# Altium PCB usb-cuter.PcbDoc
Units mm, origin at the board's own origin, x right, y up, seen from the top; angles counter-clockwise.
Board outline 151 x 86.38 mm, 2 copper layers (Top Layer, Bottom Layer); 15 components, 15 nets, 44 pads, 0 vias.
Unrouted connection lines stored in the file: 1.
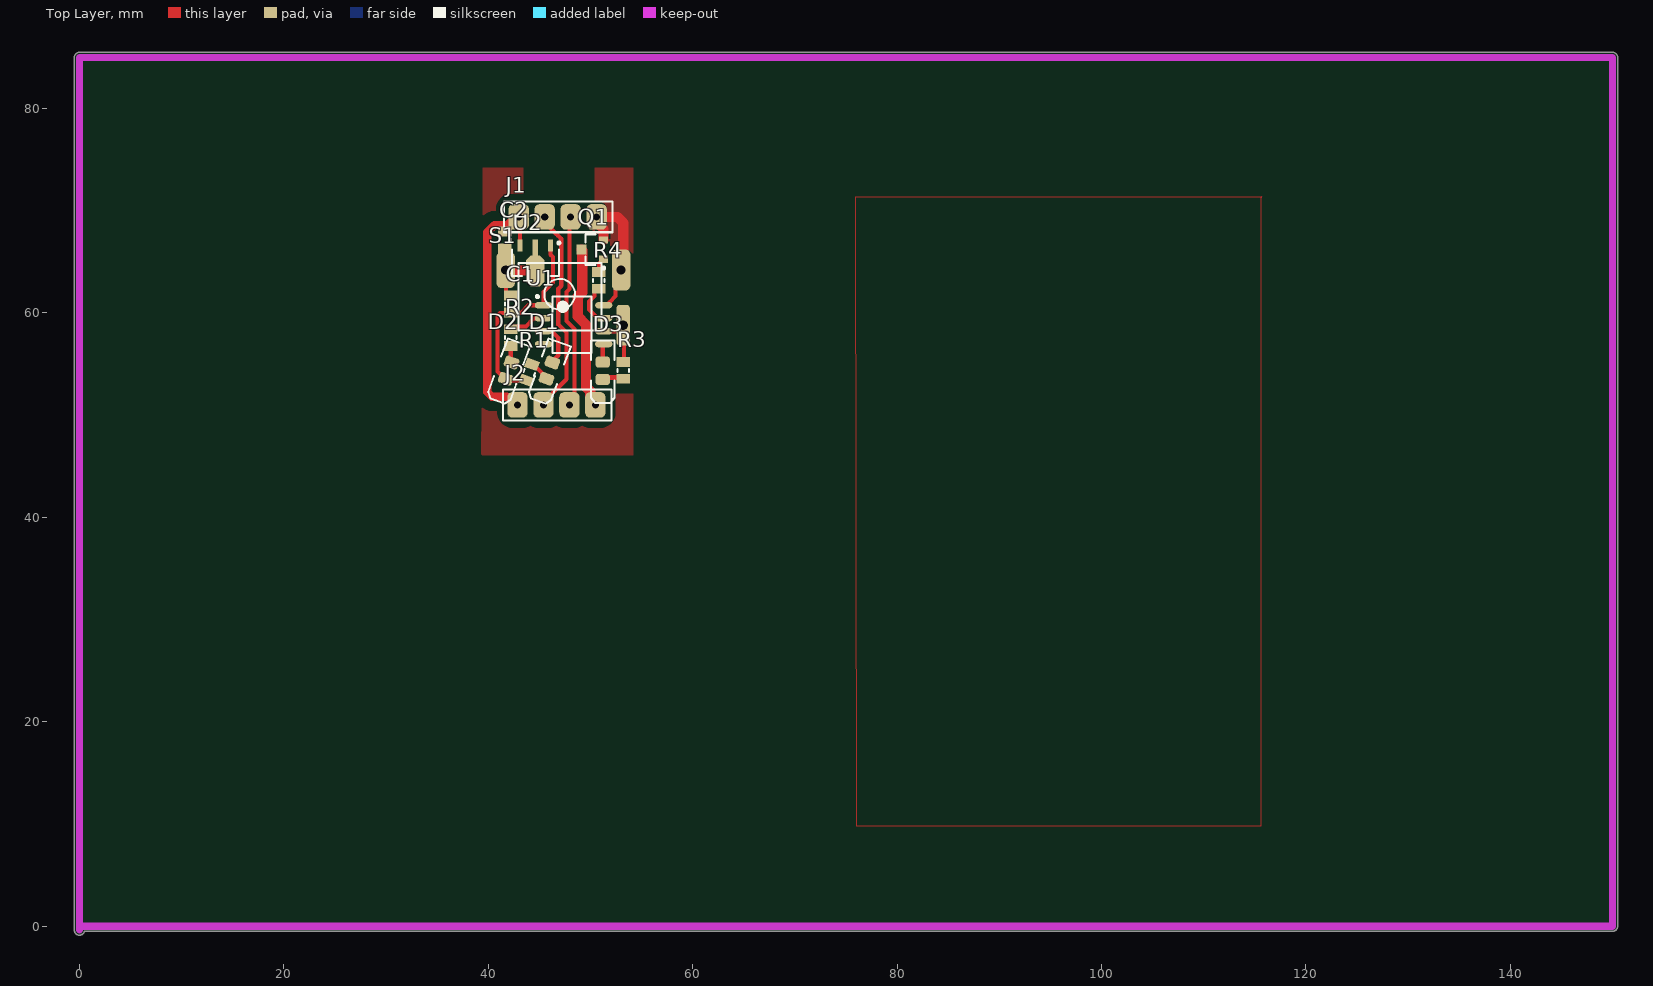
[diagram p0: Top Layer view]
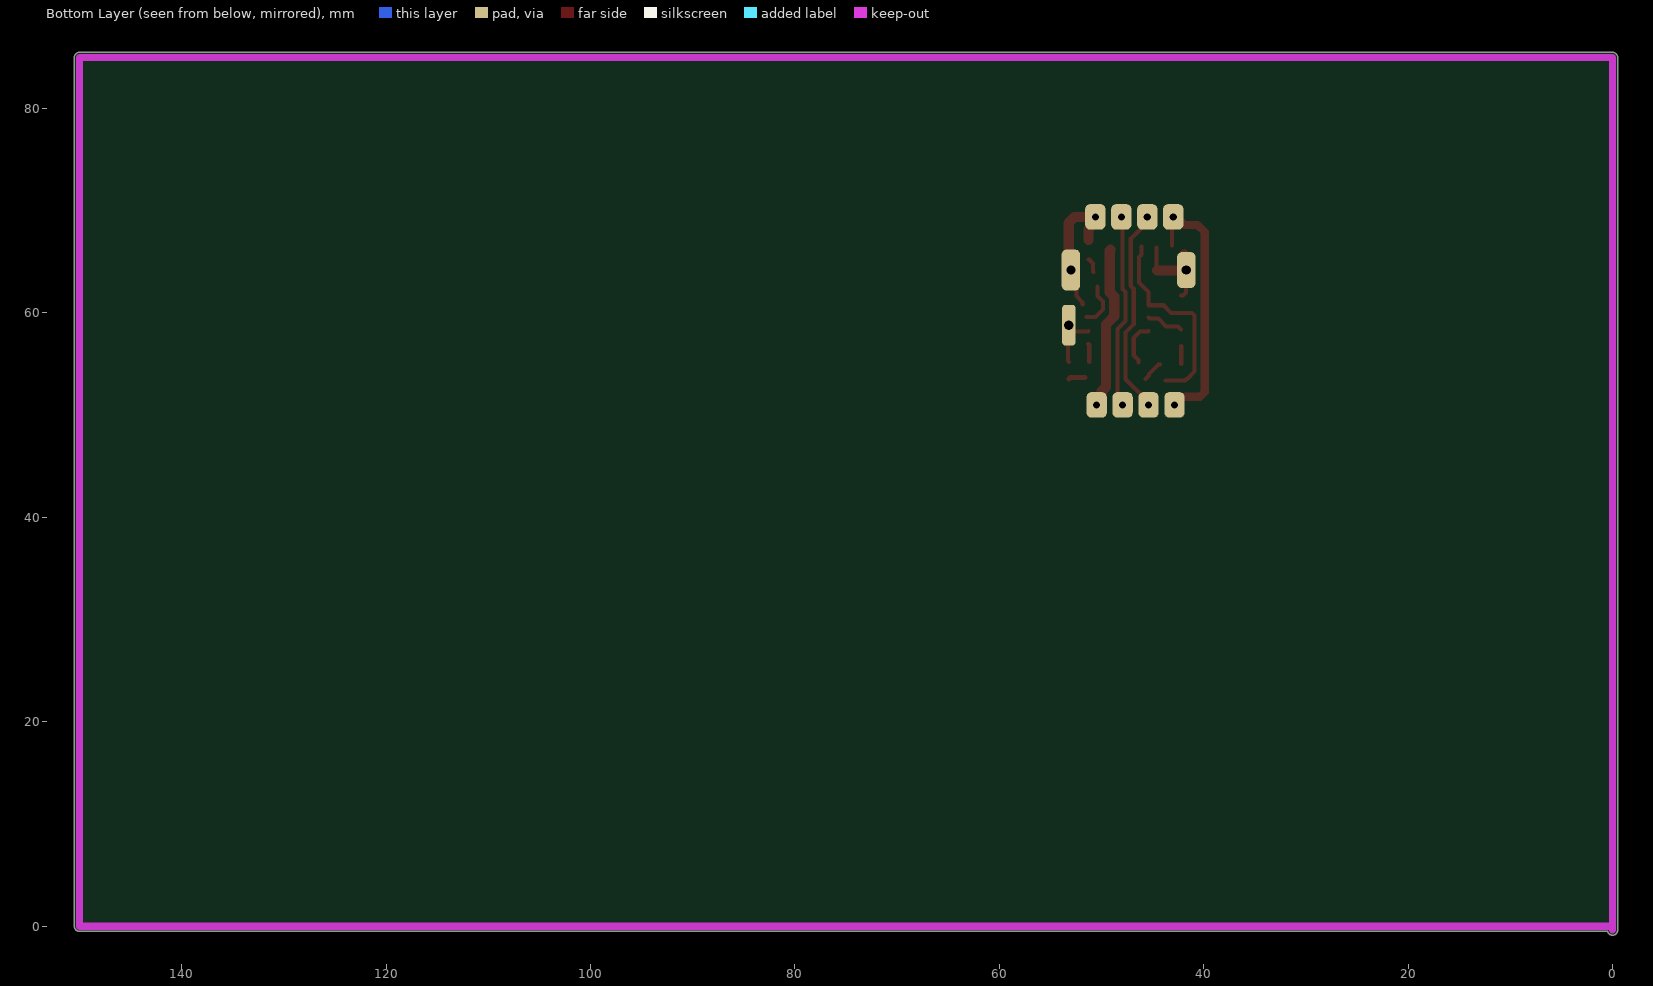
[diagram p1: Bottom Layer view, seen from below]
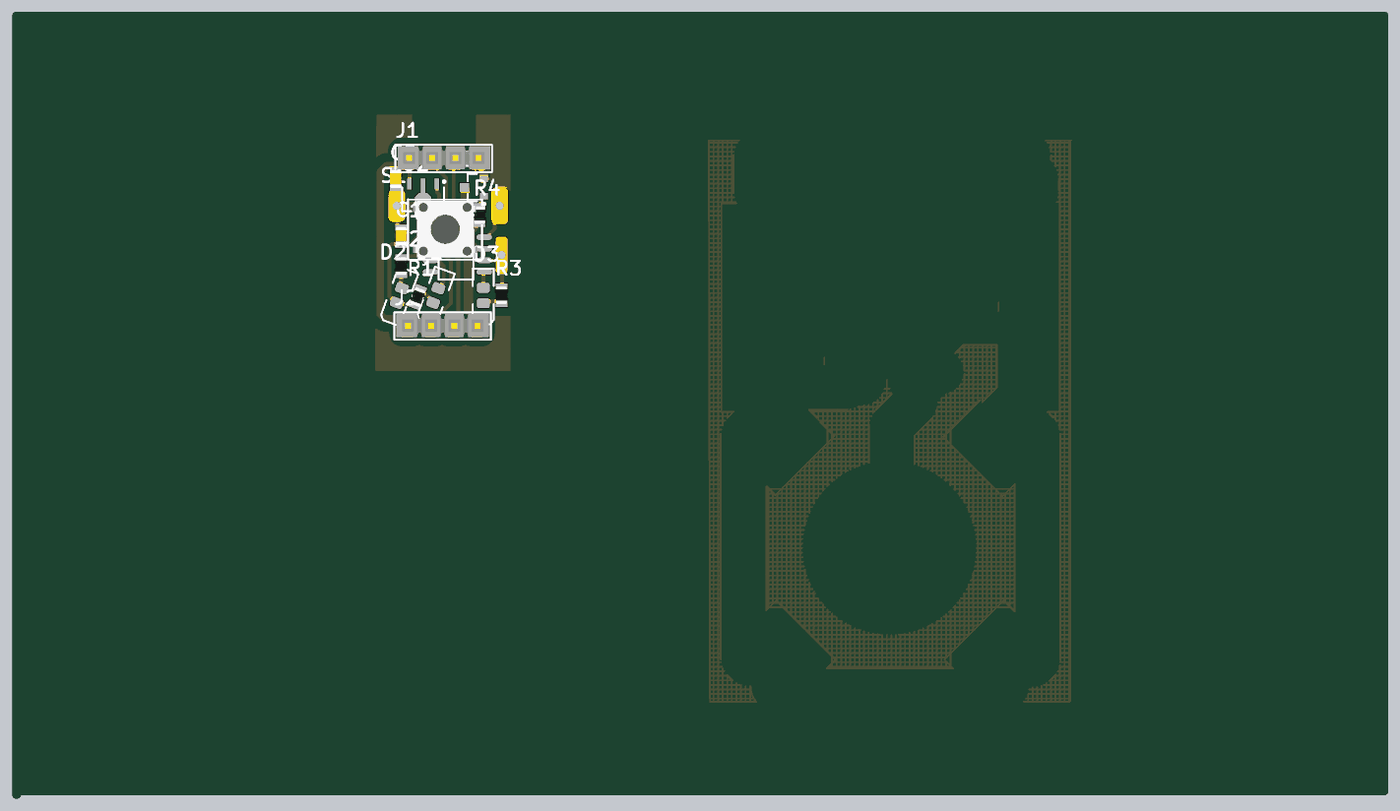
[diagram p2: 3D render of the assembled board from above, using the file's embedded part models]

## Layer stack, top to bottom
Top Solder: solder mask 0.0102, Solder Resist, Dk 3.5
Top Layer: signal copper 0.0356
Dielectric 1: dielectric 0.32, FR-4, Dk 4.8
Bottom Layer: signal copper 0.0356
Bottom Solder: solder mask 0.0102, Solder Resist, Dk 3.5

## Board outline
-0.5,-0.381 -0.5,85 cw(c0,85) 0,85.5 150,85.5 cw(c150,85) 150.5,85 150.5,0 cw(c150,0) 150,-0.5 0.486,-0.5 cw(c0,-0.381)

## Design rules (kind name [scope] priority, off if disabled: settings)
Clearance Clearance_1 [InPolygon] p1: gap=1 ignorepadtopadclearanceinfootprint=FALSE
Clearance [All] p2: gap=0.4 ignorepadtopadclearanceinfootprint=FALSE
PolygonConnect [All] p1: connectstyle=Relief reliefconductorwidth=0.254 reliefentries=4 polygonreliefangle="90 Angle" airgapwidth=0.254
RoutingLayers [All] p1: top layer_v5=FALSE bottom layer_v5=TRUE
RoutingVias [All] p1: holewidth=0.711 width=2.5 viastyle="Through Hole" minholewidth=0.711 minwidth=1.27 maxholewidth=0.711 maxwidth=2
SolderMaskExpansion [All] p1: expansion=0.102 istentingtop=FALSE
Width [All] p1: maxlimit=3 minlimit=0.4 preferedwidth=1
29 further rules are at their usual default settings.

## Components (designator, comment, footprint, x,y, rotation, side; value= is the part's Value field where it differs from the comment)
C1 "=Value" "CAP 0805" 42.2,60.814 r270 top
C2 "=Value" "CAP 0805" 41.6,67.2 r90 top
D1 "LED2" 3.2X1.6X1.1 46,54.4 r250 top
D2 "LED2" 3.2X1.6X1.1 42,54.4 r250 top
D3 "LED2" 3.2X1.6X1.1 51.2,54.4 r270 top
J1 "Header4X1" "HEADER 4X1" 42.98,69.4 r0 top
J2 "Header4X1" "HEADER 4X1" 42.86,51 r0 top
Q1 "QNPN" SOT-23B_L 50.2,66.2 r180 top
R1 "10K" "RES 0805 (2012X06L)" 44,54.2 r70 top
R2 "10K" "RES 0805 (2012X06L)" 42.2,57.6 r90 top
R3 "10K" "RES 0805 (2012X06L)" 53.2,54.4 r90 top
R4 "10K" "RES 0805 (2012X06L)" 50.8,63.2 r90 top
S1 "PUSH BUTTON DOUBLE" "PUSH BUTTON" 47,61.6 r0 top
U1 "ATtiny15L-1SC" 8S2_N 48.2,58.85 r0 top
U2 "LM1117MP-3.3" SOT89L 44.6,64.9 r270 top

## Footprints (in the part's own frame and the unit in brackets; to place one, negate y for a bottom-side part, rotate by r counter-clockwise, add the part's x,y. Pads: shape width x height; smd on the part's side, far side on the other; paste and mask are expansions set on the pad)
3.2X1.6X1.1 [mm] "SMT LED; 2 Flat Leads"
  rrect50% 1.1x1.4 smd: 1(-0.8,0) 2(0.9,0)
  silkscreen extent -2.9,-1.15 3.2,1.15
8S2_N [mm] "SOP, 8-Leads, Body 5.3x5.3mm, Pitch 1.27mm, IPC Medium Density"
  oval 1.7x0.6 smd: 1(-2.8,1.905) 2(-2.8,0.635) 3(-2.8,-0.635) 4(-2.8,-1.905) 5(3.1,-1.905) 6(3.1,-0.635) 7(3.1,0.635) 8(3.1,1.905)
  silkscreen extent -3.52,-2.75 1.9,2.88, body extent -2.73,-2.75 2.73,2.75, height 2.16
"CAP 0805" [mm]
  rect 0.95x1.3 smd: 1(-0.889,0) 2(0.761,0)
  silkscreen extent -0.21,-0.55 0.09,0.55, body extent -1.08,-0.63 0.95,0.63, height 0.65
"HEADER 4X1" [mm]
  rrect50% 2x2.5 hole 0.7: 1(0,0) 2(2.54,0) 3(5.08,0) 4(7.62,0)
  silkscreen extent -1.43,-1.5 9.18,1.5, body extent -1.19,-1.22 8.97,1.32, height 8.38
"PUSH BUTTON" [mm]
  rrect50% 1.8x3.5 hole 0.9: 1(-5.3,2.6)
  rrect50% 1.8x4 hole 0.9: 2(6,2.6)
  rrect50% 1.3x4 hole 0.9: 4(6.2,-2.8)
  silkscreen extent -4.06,-3.3 4.06,3.3, body extent -3.93,-3.08 3.99,3.12, height 5.21
"RES 0805 (2012X06L)" [mm] "Chip Resistor, 2-Leads, Body 2.0x1.3mm, IPC High Density _ (0.100 W)"
  rect 0.95x1.3 smd: 1(-0.838,0) 2(0.812,0)
  silkscreen extent -0.16,-0.55 0.14,0.55, body extent -1.03,-0.63 1,0.64, height 0.6
SOT89L [mm] "SOT89, 3-Leads, Body 4.5x2.4 mm, Pitch 1.5mm, Lead Span 4.1mm, IPC High Density"
  rect 1.2x0.5 smd: 1(-1.7,1.5) 3(-1.7,-1.5)
  rect 1.6x0.5 smd: 2(-1.5,0)
  oct 3x1.8 smd: 2(0.8,0)
  silkscreen extent -2.07,-2.3 1.3,2.43, body extent -1.3,-2.3 1.3,2.3, height 1.6
SOT-23B_L [mm] "SOT23, 3-Leads, Body 2.9x1.3mm, Pitch 0.95mm, Lead Span 2.4mm, IPC High Density"
  rect 0.85x0.7 smd: 1(-1.075,0.95) 2(-1.075,-0.95)
  rect 1x1 smd: 3(1.075,0)
  silkscreen extent -1.2,-1.5 0.7,1.92, body extent -0.7,-1.5 0.7,1.5, height 1.14

## Part data
C1 C2: library part Capacitor, "Capacitor"
D1 D2 D3: "Typical RED, GREEN, YELLOW, AMBER GaAs LED", LatestRevisionDate=17-Jul-2002, LatestRevisionNote="Re-released for DXP Platform.", PackageDescription="SM LED; 2 Flat Leads", PackageReference=3.2X1.6X1.1, PackageVersion=Feb-2002, Published=8-Jun-2000, Publisher="Altium Limited"
Q1: "NPN Bipolar Transistor", LatestRevisionDate=29-May-2009, LatestRevisionNote="IPC-7351 Footprint Added.", PackageDescription="3-Pin SOT-23 Package 0.95 mm Pitch, 2.4 mm Lead Span", PackageReference=SOT-23B, PackageVersion=Aug-1999, Published=8-Jun-2000, Publisher="Altium Limited"
R1 R2 R3 R4: library part Resistor, "Resistor", Power="1/4 W", Tolerance=5%
S1: "Switch"
U1: "8-Bit AVR Microcontroller with 1K Byte of Flash Memory", Supplier Part Number 1=ATTINY15L-1SC-ND, ComponentLink1Description=Datasheet, ComponentLink1URL=http://www.atmel.com/dyn/resources/prod_documents/doc1187.pdf, ComponentLink2Description="Atmel.com Home", ComponentLink2URL=http://www.atmel.com, DatasheetVersion=1187E-AVR-06/02, LatestRevisionDate=16-Oct-2006, LatestRevisionNote="IPC-7351 Footprint Added.", PackageDescription="8-Lead, 0.208\" Body, Plastic Small Outline Package (EIAJ)", PackageReference=8S2, PackageVersion="revF, Apr-2008", Published=17-Sep-2003, Publisher="Altium Limited", Supplier 1=Digi-Key, Supplier 2=Mouser, Supplier Part Number 2=556-ATTINY15L1SC
U2: "800mA Low-Dropout Linear Regulator", DigiKeyPartNumber=LM1117MP-3.3CT-ND, Manufacturer="National Semiconductor", PackageTopMarking=XYTT*N05A, PowerWise=N, Code_IPC=SOT223-4, Code_JEDEC=TO-261-AA, ComponentLink1Description="LM1117 Datasheet", ComponentLink1URL=http://www.national.com/ds/LM/LM1117.pdf, ComponentLink2Description="LM1117 Web Page", ComponentLink2URL=http://www.national.com/pf/LM/LM1117.html, ComponentLink3Description="MP04A Package Page", ComponentLink3URL=http://www.national.com/packaging/folders/mp04a.html, CompType="LDO IC", DatasheetVersion=Apr-2006, PackageDescription="Molded SOT-223, 6.50 x 3.56 x 1.6mm Body, 4 Lead, 2.3mm Pitch", PackageReference=MP04A, PackageVersion="revB, Apr-2003", PartNumber=LM1117MP-3.3, PinCount=4, Published=4-Dec-2008, Publisher="Altium Limited", RoHS=O

## Nets (pads, with @x,y where several pads share a name; then routed paths per layer and width w, separated by ;. In a path a pad name is that pad's centre, name@x,y a point inside that pad or via, vN(x,y) a via of type N, cw(c..) or ccw(c..) an arc to the next point about the centre after c; other vN are vias at no path point)
btn: R3.2 S1.4 U1.6 | length 5.3
  Top Layer w0.4: U1.6 51.315,58.2 52.76,58.2 53.2,58.64 S1.4 ; R3.2 R3.2@53.27,55.282 ; R3.2@53.27,55.482 S1.4@53.27,58.412
GND: C1.1 C2.1 J1.4 Q1.2 S1.1 S1.2 U1.8 U2.2 | length 23.3
  Top Layer w0.4: S1.1 41.75,64.15 41.75,61.978 42.025,61.703 C1.1 ; U2.2@44.55,64.15 44.6,64.2 U2.2@44.6,66.4 ; U1.8@51.835,60.849 51.888,60.902 51.888,61.088 52.454,61.654 52.454,63.654 S1.2@53.2,64.4
  Top Layer w1: S1.1@41.75,64.15 U2.2@44.55,64.15 ; S1.1@41.9,64.3 S1.1@41.9,65.7 ; J1.4@50.34,69.4 52.614,69.4 53.2,68.814 S1.2@53.2,64.4 ; J1.4@50.82,69.4 50.82,68.67 51.275,68.215 Q1.2
led1: D1.1 U1.3 | length 4.3
  Top Layer w0.4: U1.3 45.438,58.177 46.223,58.177 46.85,57.55 46.85,55.865 46.4,55.415 D1.1@46.4,55.152
led2: R2.2 U1.2 | length 3.6
  Top Layer w0.4: R2.2@42.234,58.4 42.52,58.687 43.687,58.687 44.447,59.447 45.307,59.447 U1.2@45.4,59.54
led3: D3.1 U1.5 | length 1.8
  Top Layer w0.4: D3.1 51.2,56.853 51.292,56.945 U1.5
NetD1_2: D1.2 R1.2 | length 2.1
  Top Layer w0.4: R1.2 44.437,54.963 45.358,54.042 45.358,53.888 D1.2
NetD2_1: D2.1 R2.1 | length 1.8
  Top Layer w0.4: D2.1@42.2,54.991 R2.1
NetD3_2: D3.2 R3.1 | length 1.7
  Top Layer w0.5: D3.2@51.6,53.7 53.062,53.7 R3.1
NetJ1_2: J1.2 J2.2 | length 20.1
  Top Layer w0.4: J1.2@45.4,69.6 45.4,68.994 46.594,67.8 46.599,67.8 46.849,67.55 47.14,67.259 47.14,62.66 46.85,62.37 46.85,58.881 47.65,58.081 47.65,53.516 45.8,51.666 J2.2@45.8,51.4
NetJ1_3: J1.3 J2.3 | length 18.7
  Top Layer w0.4: J1.3@47.94,69.6 47.94,62.329 47.65,62.039 47.65,59.213 48.45,58.413 48.45,51.57 J2.3@48.28,51.4
NetJ2_4: J2.4 Q1.3 | length 15.6
  Top Layer w1: Q1.3 49.2,66.125 49.2,62.033 48.75,61.583 48.75,59.668 49.55,58.868 49.55,52.788 49.98,52.358 49.98,51.75 50.17,51.56 J2.4@50.32,51.56
NetQ1_2: Q1.1 R4.2 | length 1.5
  Top Layer w0.4: R4.2 50.846,64.058 50.846,64.852 51.05,65.056 51.05,65.1 51.2,65.25 Q1.1
out: R4.1 U1.7 | length 4.4
  Top Layer w0.4: R4.1@50.4,62.562 50.4,61.678 49.85,61.128 49.85,60.338 50.584,59.604 U1.7@51.472,59.604
vcc: C1.2 D2.2 R1.1 U1.1 U2.1 | length 19.7
  Top Layer w0.4: D2.2@41.613,53.554 40.9,54.267 40.9,59.766 41.134,60 42.2,60 42.216,60.016 43.216,60.016 43.955,60.755 U1.1 ; D2.2 41.834,53.412 R1.1 ; U1.1@45.4,60.81 45.4,62.052 46.34,62.992 46.34,65.46 46.1,65.7 U2.1@46.1,66.5
vdd: C2.2 J1.1 J2.1 U2.3 | length 26
  Top Layer w0.4: 41.8,68.761 42.067,68.494 42.706,68.494 43.1,68.1 U2.3
  Top Layer w0.8: J2.1 42.86,51.196 42.268,51.788 41.803,51.788 41.791,51.8 40.369,51.8 39.9,52.269 39.9,67.902 40.598,68.6 41.86,68.6 42.451,69.191 J1.1@42.86,69.6
pads on no net: U1.4

## Polygon pours and split planes (outlines as drawn)
GND on Top Layer "GND_L01_P025" (solid, pour order 25): 39.469,74.2 43.4,74.2 43.4,69.6 43.8,69.2 49.8,69.2 50.4,69.8 50.4,74.2 54.2,74.2 54.2,46.065 51.84,46.065 42.04,46.065 39.328,46.065
GND on Top Layer "NONET_L01_P024" (hatched 90Degree grid 0.5 track 0.2, shelved, pour order 24): 75.946,71.374 115.697,71.374 115.57,71.247 115.57,9.779 76.073,9.779

## Keep-outs
Keep-Out Layer:
  lines w0.7: 0,-0.381 0,85 150,85 150,0 0,0

## Silkscreen, mask and mechanical layers (free items; w line width, h text height)
Bottom Solder:
  lines w0.2: 39.2,45.6 54.2,45.6 54.2,74.6 39.2,74.6 39.2,45.6